# Altium PCB PCB_Radiance.PcbDoc (part 2 of 2)
Units mil, origin at the board's own origin, x right, y up, seen from the top; angles counter-clockwise.
Board outline 2362.21 x 2362.21 mil, 4 copper layers (Top Layer, GroundPlane, PowerPlane, Bottom Layer), stack 58.4 mil thick; 120 components, 82 nets, 399 pads, 18 vias.
Unrouted connection lines stored in the file: 128.
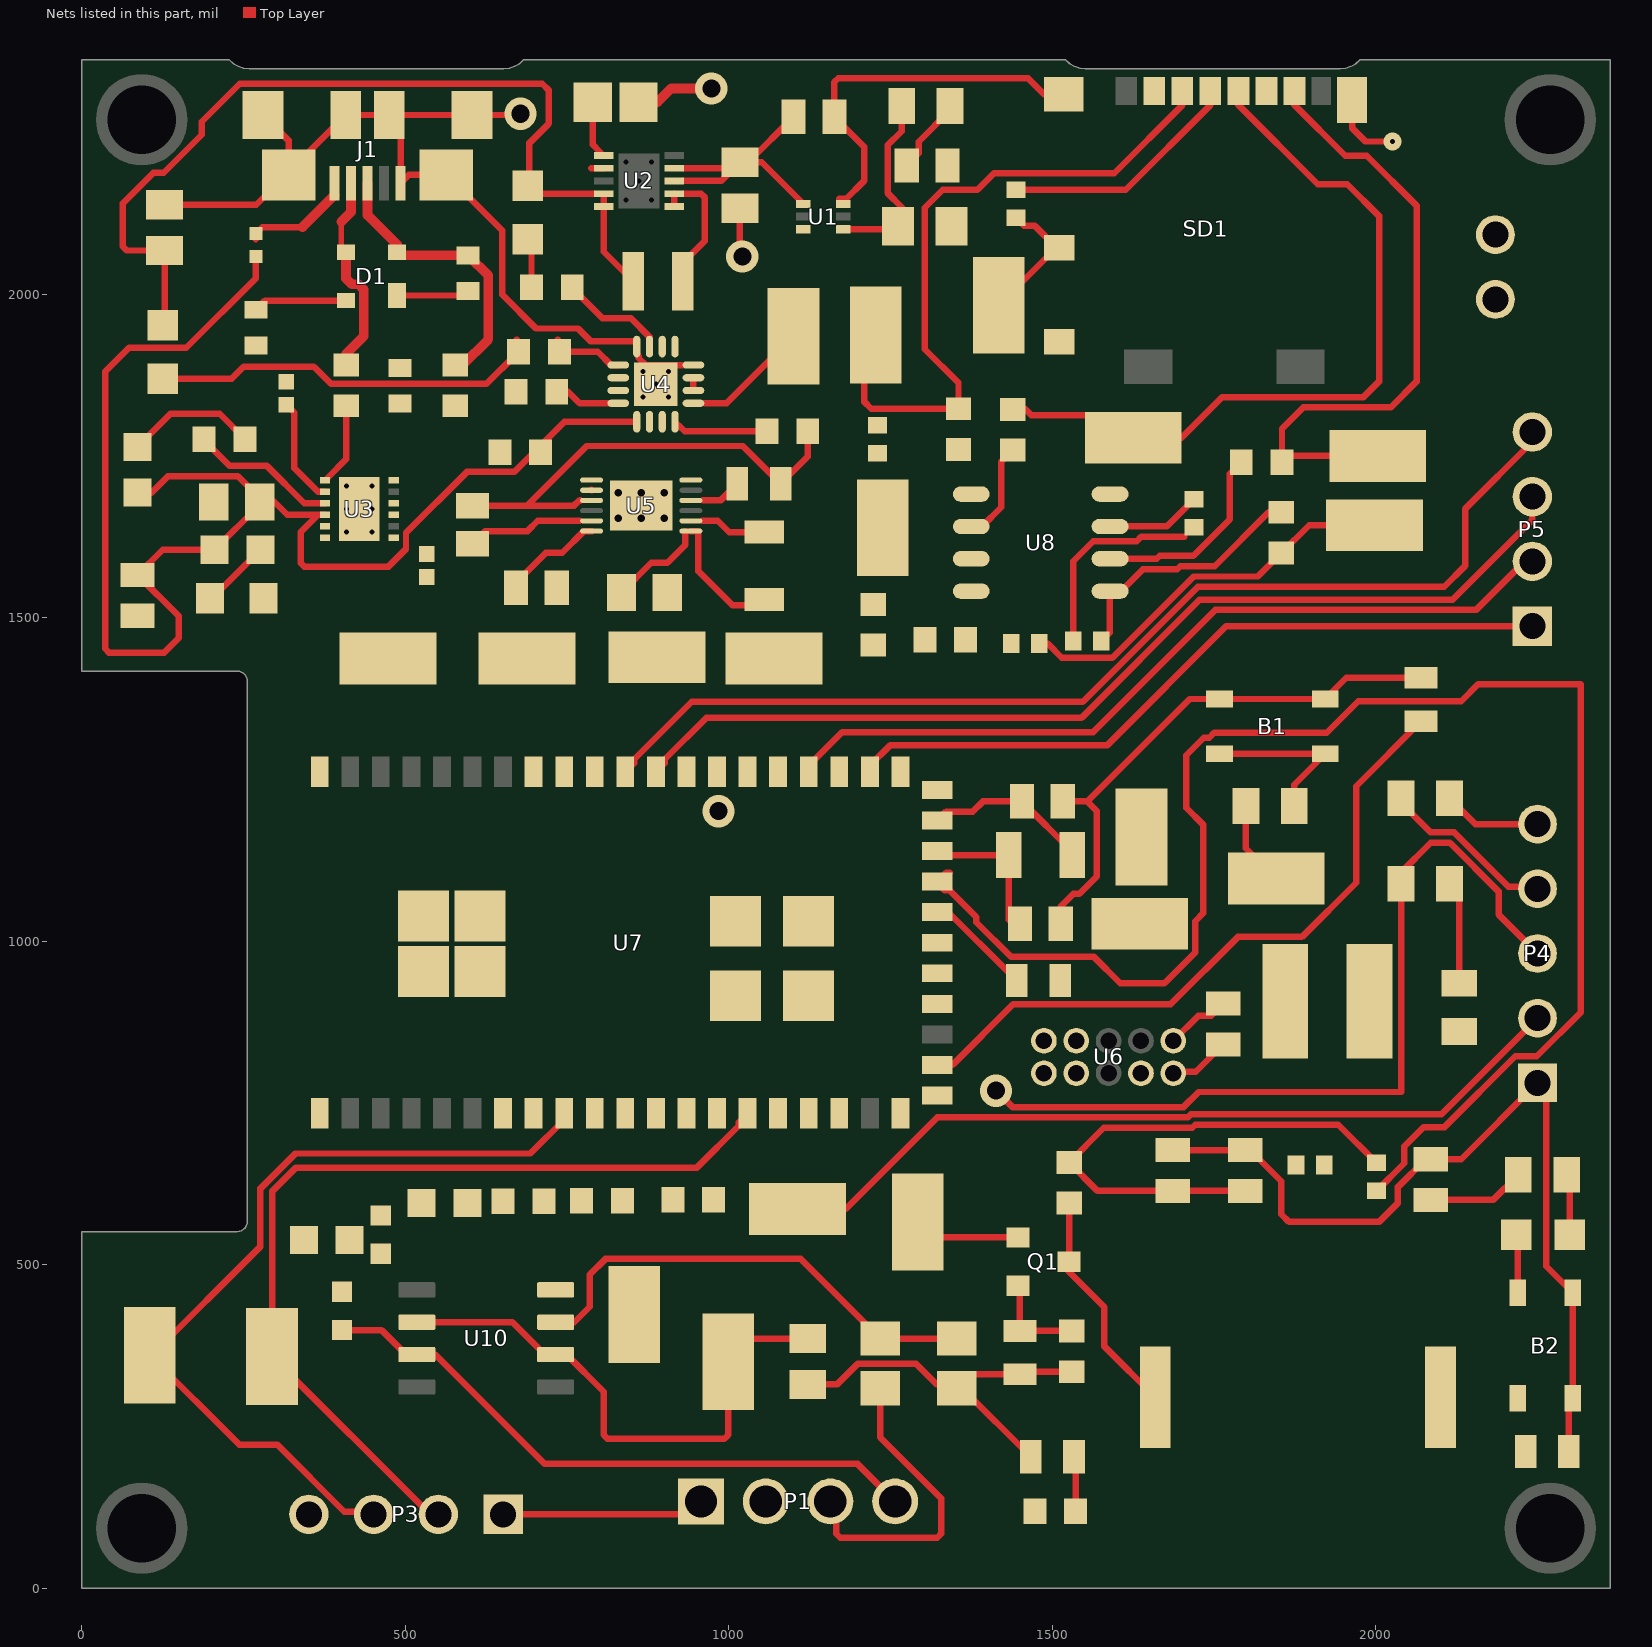
[diagram p2: the nets of this part, all layers, seen from the top]

## Part data (continued)
L1: library part CMP-0904-00016-1, "SDR0403 Series Power Inductor, 1 uF +/- 20 %, 0.033 Ohm, -40 to 125 degC, 2-Pin SMD, RoHS, Tape and Reel", Inductance (uH)=1, Manufacturer=Bourns, PartNumber=SDR0403-1R0ML, Temperature Range="-40 to 125 degC", Test Frequency (MHz)=7.96, Tolerance (%)="+/- 20", ComponentLink1Description="Manufacturer URL", ComponentLink1URL=http://www.bourns.com/, ComponentLink2Description=Datasheet, ComponentLink2URL=http://www.bourns.com/data/global/pdfs/sdr0403.pdf, DatasheetVersion=Feb-12, I rms (A)="3.8 Max.", I sat (A)="5.5 Typ.", Mounting Technology="Surface Mount", PackageDescription="3-Pin SMD, Dia 4.5 mm, Height 3.5 mm", PackageReference=SDR0403-2, Packing="Tape and Reel", Q=28, RDC (Ohm)="0.033 Max.", RoHS=TRUE, SRF (MHz)="150 Min."
L2: library part CMP-1411-00009-1, "Power Multilayer Inductor WE-MAPI, L=1.0µH", Inductance=1.0µH, Manufacturer="Wuerth Elektronik", PartNumber=74438323010, ComponentLink1Description="Manufacturer URL", ComponentLink1URL=http://www.we-online.com, ComponentLink2Description=Datasheet, ComponentLink2URL=http://katalog.we-online.de/kataloge/eisos/media/pdf/74438323010.pdf, PackageReference="SMD 2510"
P1: library part CMP-2000-05419-1, "Male Header, Pitch 2.54 mm, 1 x 4 Position, Height 10.03 mm, Tail Length 3.56 mm, RoHS, Bulk", Color=White, Current, Rating="5 /  / A", Flammability Rating=UL94V-0, Manufacturer="TE Connectivity", Temperature, Operating="-55to+105 /  / degC", Voltage, Rating="250 /  / V", Agency Approvals=CSA,UL, Angle=Straight, Brand/Series=MTA-100Series, Color, Housing=White, Connector Type=MTA-100, Contact Centerline Spacing="0.100 /  / in.", Contact Mating Area Plating=Tin, Contact Plating=Tin, Contact Shape=Square, Contact Termination Area Plating=Tin, Datasheet URL=https://datasheet.ciiva.com/16286/eng-ds-82056-mta-0608-16286228.pdf, Datasheet Version=Dec-14, Length, Overall="0.4 /  / \"", Length, Pin="0.14 /  / \"", Length, Terminal Post="0.14 /  / in.", Manufacturer URL=http://www.te.com/, Material, Contact=CopperAlloy, Material, Housing=Polyester, Mount Angle=Vertical, Mounting Hole Size="0.04 /  / \"", Mounting Type=PCMount, Number of Contacts=4, Number of Positions=4, Number of Rows=1, Pin Spacing="0.1 /  / \"", Primary Type=InterconnectSystem, Size, Post="0.025 /  / in.", Special Features=Pinstrip, Standards=RoHSCompliant,ELVCompliant,UL94V-0, Termination=Solder, Type=PCBPlug
P2: "CONN HEADER VERT 2POS .100 TIN", Colour=White,Natural,Beige, Contact Resistance=6mR, Current Rating=5A, Flammability Rating="UL94 V-0", Housing Colour=Natural, Manufacturer="TE Connectivity", Max Operating Temperature=221°C, Max Voltage Rating (AC)=250V, Min Operating Temperature=-67°C, Package Quantity=5000, Supplier Part Number 1=A1921-ND, Approvals=CSA, Backwall/Post Interruptions="No (Without)", ComponentLink1Description=https://datasheet.ciiva.com/709/eng-cd-640456-w1-709680.pdf, ComponentLink1URL=https://datasheet.ciiva.com/709/eng-cd-640456-w1-709680.pdf, ComponentLink2Description=https://datasheet.ciiva.com/3118/eng-ds-82056-mta-0608-3118497.pdf, ComponentLink2URL=https://datasheet.ciiva.com/3118/eng-ds-82056-mta-0608-3118497.pdf, ComponentLink3Description=https://datasheet.ciiva.com/19462/613931-19462481.pdf, ComponentLink3URL=https://datasheet.ciiva.com/19462/613931-19462481.pdf, ComponentLink4Description=https://datasheet.ciiva.com/14156/04384301-14156820.pdf, ComponentLink4URL=https://datasheet.ciiva.com/14156/04384301-14156820.pdf, ComponentLink5Description=https://datasheet.ciiva.com/7128/1866390-7128742.pdf, ComponentLink5URL=https://datasheet.ciiva.com/7128/1866390-7128742.pdf, ComponentLink6Description=https://datasheet.ciiva.com/16401/eng-ds-82056-mta-0608-16401289.pdf, ComponentLink6URL=https://datasheet.ciiva.com/16401/eng-ds-82056-mta-0608-16401289.pdf, ComponentLink7Description=https://datasheet.ciiva.com/16505/eng-ds-82056-mta-0608-16505419.pdf, ComponentLink7URL=https://datasheet.ciiva.com/16505/eng-ds-82056-mta-0608-16505419.pdf, ComponentLink8Description=https://datasheet.ciiva.com/25617/0900766b80027008-25617244.pdf, ComponentLink8URL=https://datasheet.ciiva.com/25617/0900766b80027008-25617244.pdf, ComponentLink9Description=https://datasheet.ciiva.com/11746/0900766b80eb7fdd-11746365.pdf, ComponentLink9URL=https://datasheet.ciiva.com/11746/0900766b80eb7fdd-11746365.pdf, Connector System=Wire-to-Board, Connector Type=Plug,Pin,Header, Contact Gender=Male, Contact Material="Copper Alloy", Contact Mating Length=0.295inch, Contact Plating=Tin, Contact Retention="No (Without)", Contact Shape=Square, Contact Style=Straight, Depth=5.72mm, ELV=Compliant, Fastening Type=Friction, Gender=Male, Height=7.87mm, Housing Material=Polyester, Lead Free="Lead Free", Lead Pitch=2.54mm, Length=5.08mm, Manufacturer Part Number=640456-2, Mating Alignment="No (Without)", Mating Post Length=7.49mm, Mating Retention="No (Without)", Max Current Rating=5A, Mount="Through Hole", Number of Contacts=2, Number of Poles=2, Number of Positions=2, Number of Rows=1, Orientation=Straight, Packaging=Bulk, Panel Mount Retention="No (Without)", PCB Mount Alignment="No (Without)", PCB Mounting Orientation=Vertical, PCB Mount Retention=Without, PCB Thickness=0.063inch, Pitch=2.54mm, Plating Thickness=3.81um, Pricing 1="1=0.12, 10=0.117, 100=0.0724, 500=0.0599, 1000=0.0524, 5000=0.0449, 10000=0.0437 (USD)", Radiation Hardening=No, REACH SVHC="No SVHC", Sealable="No (Without)", Stock 1=141304, Strain Relief="No (Without)", Supplier 1=Digi-Key, Tail Length=3.56mm, Termination=Solder, Termination Post Length=3.56mm, Underplate Material=Nickel, Voltage Rating=250V, Voltage Rating (AC)=250V, Working Voltage=250V
P3 P5: library part CMP-1024-00107-1, Manufacturer=Samtec, PartNumber=MTSW-104-07-L-S-170, Temperature Range="-55 to 125 degC", ComponentLink1Description="Manufacturer URL", ComponentLink1URL=http://www.samtec.com, ComponentLink2Description=Datasheet, ComponentLink2URL=http://www.samtec.com/documents/webfiles/pdf/MTSW.PDF, ComponentLink3Description="Package Specification", ComponentLink3URL=http://www.samtec.com/documents/webfiles/cpdf/MTSW-XXX-XX-X-X-XXXX-XX-XXX-MKT1.pdf, DatasheetVersion=F-214, Mounting Technology=Through-hole, Orientation=Vertical, PackageReference=MTSW-104-07-X-S-170, PackageVersion="BI, 2/1987", Pitch="2.54 mm", RoHS=True
P4: library part CMP-1024-00079-1, Manufacturer=Samtec, PartNumber=MTLW-105-05-L-S-190, Temperature Range="-55 to 125 degC", ComponentLink1Description="Manufacturer URL", ComponentLink1URL=http://www.samtec.com, ComponentLink2Description=Datasheet, ComponentLink2URL=http://www.samtec.com/documents/webfiles/pdf/MTLW_TH.PDF, ComponentLink3Description="Package Specification", ComponentLink3URL=http://www.samtec.com/documents/webfiles/cpdf/MTLW-1XX-XX-XX-X-XXX-XX-XX-MKT1.pdf, DatasheetVersion=F-214, Mounting Technology=Through-hole, Orientation=Vertical, PackageDescription="Low Profile Terminal Assembly", PackageReference=MTLW-105-05-X-S-190, PackageVersion="T, 6/1991", Pitch="2.54 mm", RoHS=True
Q1: library part CMP-1048-00774-1, "General Purpose Transistor, NPN Silicon, 3-Pin SOT-23, Pb-Free, Tape and Reel", Manufacturer="On Semiconductor", ComponentLink1Description="Manufacturer URL", ComponentLink1URL=http://www.onsemi.com/, ComponentLink2Description=Datasheet, ComponentLink2URL=http://www.onsemi.cn/pub_link/Collateral/BC846ALT1-D.PDF, ComponentLink3Description="Package Specification", ComponentLink3URL=http://www.onsemi.cn/pub_link/Collateral/318-08.PDF, DatasheetVersion="Rev. 11", fT Min (MHz)=100, IC Continuous (A)=0.1, Mounting Technology="Surface Mount", PackageDescription="3-Pin Small Outline Transistor, Body 2.92 x 1.3 mm, Pitch 0.95 mm", PackageReference=SOT-23-3-318-08, PackageVersion="Rev. AP, 11/2009", Packing="Tape and Reel", PartNumber=BC846ALT1G, Polarity=NPN, RoHS=TRUE
R1: library part CMP-1013-00810-1, "453K 0.125W 1% 0805 (2012 Metric)  SMD", Case-EIA=0805, Case-Metric=2012, Power="0.125 W", Tolerance="1 %", Technology=SMT
R2: library part CMP-1013-00124-1, "120K 0.125W 5% 0805 (2012 Metric)  SMD", Case-EIA=0805, Case-Metric=2012, Power="0.125 W", Tolerance="5 %", Technology=SMT
R3 R4 R34 R35 R36: library part CMP-1012-00331-1, "27R 0.1W 1% 0603 (1608 Metric)  SMD", Case-EIA=0603, Case-Metric=1608, Power="0.1 W", Tolerance="1 %", Technology=SMT
R5 R7 R27 R33: library part CMP-1012-00510-1, "1K 0.1W 1% 0603 (1608 Metric)  SMD", Case-EIA=0603, Case-Metric=1608, Power="0.1 W", Tolerance="1 %", Technology=SMT
R6 R16 R20 R21 R22 R28 R42: library part CMP-1012-00001-1, "Jumper 0603 (1608 Metric)", Case-EIA=0603, Case-Metric=1608, Power=None, Technology=SMT, Tolerance=None
R8 R9 R10 R11 R40: library part CMP-1012-00511-1, "1K02 0.1W 1% 0603 (1608 Metric)  SMD", Case-EIA=0603, Case-Metric=1608, Power="0.1 W", Tolerance="1 %", Technology=SMT
R12 R29 R30 R31 R32: library part CMP-1013-00624-1, "10K2 0.125W 1% 0805 (2012 Metric)  SMD", Case-EIA=0805, Case-Metric=2012, Power="0.125 W", Tolerance="1 %", Technology=SMT
R13: library part CMP-2003-00764-1, Manufacturer=Panasonic, Part Number=ERJ8BWFR010V
R14 R17 R18 R19 R23 R24 R43: library part CMP-1011-00098-1, "10K 0.063W 5% 0402 (1005 Metric)  SMD", Case-EIA=0402, Case-Metric=1005, Power="0.063 W", Tolerance="5 %", Technology=SMT
R15 R44: library part CMP-1013-00040-1, "39R 0.125W 5% 0805 (2012 Metric)  SMD", Case-EIA=0805, Case-Metric=2012, Power="0.125 W", Tolerance="5 %", Technology=SMT
R25 R26: library part CMP-2001-04376-1, Manufacturer=Panasonic, Part Number=ERJ-6ENF1002V
R37 R38 R39: library part CMP-1013-00594-1, "5K49 0.125W 1% 0805 (2012 Metric)  SMD", Case-EIA=0805, Case-Metric=2012, Power="0.125 W", Tolerance="1 %", Technology=SMT
R41: library part CMP-1013-00058-1, "220R 0.125W 5% 0805 (2012 Metric)  SMD", Case-EIA=0805, Case-Metric=2012, Power="0.125 W", Tolerance="5 %", Technology=SMT
Red1: library part CMP-1426-00010-1, "SMD mono-color Chip LED, WL-SMCW, Super Red", Color="Super Red", Manufacturer="Wuerth Elektronik", ComponentLink1Description="Manufacturer URL", ComponentLink1URL=http://www.we-online.com, ComponentLink2Description=Datasheet, ComponentLink2URL=http://katalog.we-online.com/led/datasheet/150080SS75000.pdf, PackageReference=0805_A, PartNumber=150080SS75000
SD1: library part CMP-2000-05825-1, "Micro SD Card, RA, -25 to 85 degC, 8-Pin SMD, RoHS, Tape and Reel", Current Rating=500mA, Manufacturer=Molex, Package Description="8-Pin Surface Mount Device, Body 11.95 x 11.4 mm, Pitch 1.1 mm", Voltage Rating=10VAC/DC, Brand=Molex, Card Type=microSD, Contact Material=PhosphorBronze, Contact Plating=Gold, Datasheet URL=http://www.molex.com/pdm_docs/sd/1040310811_sd.pdf, Datasheet Version="Rev. E, 04/2006", Height=1.42mm, Housing Material=LiquidCrystalPolymer(LCP), Insertion - Extraction Style=Push-Pull, Length=11.4mm, Manufacturer URL=http://www.molex.com/, Mating Cycles=10000, Mounting Technology=SurfaceMount, Mounting Type=Standard, Number of Contacts=8, Number of Rows=1Row, Orientation=RightAngle, Package Reference=104031-0811, Packaging=Reel, Pitch=1.1mm, Product=CardConnectors, Product Category=MemoryCardConnectors, RoHS=True, Series=104031, Termination Style=SMD
TP1 TP2 TP3 TP4 TP5 TP6 TP7 TP8 TP9 TP10 TP11 TP12 TP13 TP14 TP15 TP16 TP17 TP18 TP19 TP20: library part CMP-1672-00008-1, "Test Point, 1 Position SMD, RoHS, Tape and Reel", Package Quantity=1000, ComponentLink1Description="Manufacturer URL", ComponentLink1URL=http://www.keyelco.com/, ComponentLink2Description=Datasheet, ComponentLink2URL=http://www.keyelco.com/product-pdf.cfm?p=1357, Contact Plating=Silver, DatasheetVersion=03/2014, Mount="Surface Mount", Mounting Technology="Surface Mount", PackageDescription="1-Pin Surface Mount Device, Body 3.81 x 2.03 mm", PackageReference=5019, Packaging="Tape and Reel", Pins=1, RoHSCompliant=True
U1: Manufacturer="Texas Instruments", Manufacturer Part Number=TLV62569ADRLR, Supplier Part Number 1=296-51692-1-ND, Pricing 1="1 = 1.32000, 10 = 1.17600, 100 = 0.91680, 500 = 0.75736, 1000 = 0.59792 (USD)", Stock 1=1873, Supplier 1=Digi-Key
U2: Manufacturer="Texas Instruments", Max Input Voltage=5.5V, Max Operating Temperature=85°C, Max Output Current=2.1A, Min Input Voltage=2.3V, Min Operating Temperature=-40°C, Min Output Voltage=5V, Operating Supply Current=35uA, Package Quantity=250, Supplier Part Number 1=296-37990-1-ND, Switching Frequency=2MHz, ComponentLink1Description=http://www.farnell.com/datasheets/1902710.pdf?src-supplier=Element14, ComponentLink1URL=http://www.farnell.com/datasheets/1902710.pdf?src-supplier=Element14, Contact Plating=Gold, Efficiency=96%, Lead Free="Lead Free", Manufacturer Part Number=TPS61232DRCT, Min Supply Voltage=2.3V, Mount="Surface Mount", Nominal Output Voltage=5V, Number of Outputs=1, Number of Pins=10, Operating Supply Voltage=5.5V, Output Configuration=Positive, Output Current=2.1A, Output Type=Fixed, Output Voltage=5V, Packaging="Tape and Reel", Pricing 1="1 = 2.92000, 10 = 2.62600, 100 = 2.11050 (USD)", Quiescent Current=35uA, REACH SVHC="No SVHC", RoHS=Yes, Stock 1=5502, Supplier 1=Digi-Key, Synchronous Rectifier=Yes, Topology=Boost, Weight=0.000921oz
U3: library part CMP-0248-00027-1, "FT234XD USB to BASIC UART IC, -40 to +85 degC, 12-Pin DFN, Pb-Free, Tape and Reel", Manufacturer=FTDI, ComponentLink1Description="Manufacturer URL", ComponentLink1URL=http://www.ftdichip.com/, ComponentLink2Description=Datasheet, ComponentLink2URL=http://www.ftdichip.com/Support/Documents/DataSheets/ICs/DS_FT234XD.pdf, DatasheetVersion="ver 1.1, Feb-2013", PackageDescription="12-Pin Dual Flat No-Lead, 3 x 3 mm Body, 0.45 mm Pitch, Exposed Pad", PackageReference=DFN-12, PackageVersion=Feb-13, PartNumber=FT234XD-R
U4: library part CMP-0321-00237-1, "USB-Friendly Li-Ion Battery Charger and Power-Path Management IC, Vout 5.5 V, 4.3 V, -40 to 85 degC, 16-pin QFN (RGT), Green (RoHS & no Sb/Br)", Manufacturer="Texas Instruments", Over Voltage Protection=N, Code_JEDEC=MO-220, ComponentLink1Description=Datasheet, ComponentLink1URL=http://www.ti.com/general/docs/lit/getliterature.tsp?genericPartNumber=BQ24075&fileType=pdf, DatasheetVersion=SLUS810G, Eco-Plan="Green (RoHS & no Sb/Br)", Lead Acid=N, Li-Ion=N, Li-Polymer=N, Mounting Technology="Surface Mount", NiCd=N, NiMH=N, PackageDescription="16-Pin Plastic Quad Flat No-Lead, 3 x 3 mm Body, 0.5 mm Pitch, 1.7 x 1.7 mm Exposed Pad", PackageReference=RGT16-1700X1700TP, PackageVersion="revH, Oct-2011", PartNumber=BQ24075RGTRG4, SubFamily="Battery Charge Management", Vin(Min)(V)=4.3
U5: Capacity=8000mAh, Case/Package=QFN, Manufacturer="Texas Instruments", Max Operating Temperature=85°C, Min Operating Temperature=-40°C, Operating Supply Voltage=4.5V, Output Current=500uA, Output Voltage=600mV, Package Quantity=3000, Supplier Part Number 1=296-39941-1-ND, Contact Plating=Gold, Interface=I2C, Lead Free="Lead Free", Manufacturer Part Number=BQ27441DRZR-G1A, Mount="Surface Mount", Number of Cells=1, Number of Pins=12, Packaging="Tape and Reel", Pricing 1="1 = 2.62000, 10 = 2.35300, 100 = 1.89110, 500 = 1.55376, 1000 = 1.28740 (USD)", RoHS=Yes, Stock 1=20268, Supplier 1=Digi-Key
U6: "CONN HEADER 10POS UNSHD VERT T/H", Current Rating="10 A", Manufacturer="Amphenol / FCI", Supplier Part Number 1=609-3712-ND, Voltage Rating="125 V", Brand=FCI, ComponentLink1Description=https://datasheet.ciiva.com/1433/1079612-1433267.pdf, ComponentLink1URL=https://datasheet.ciiva.com/1433/1079612-1433267.pdf, ComponentLink2Description=https://datasheet.ciiva.com/409/20021111-409158.pdf, ComponentLink2URL=https://datasheet.ciiva.com/409/20021111-409158.pdf, ComponentLink3Description=https://datasheet.ciiva.com/5131/20021111-5131386.pdf, ComponentLink3URL=https://datasheet.ciiva.com/5131/20021111-5131386.pdf, ComponentLink4Description=https://datasheet.ciiva.com/9465/20021111-9465402.pdf, ComponentLink4URL=https://datasheet.ciiva.com/9465/20021111-9465402.pdf, Contact Material=Nickel, Contact Plating=Gold, Factory Pack Quantity=93, Housing Material=Plastic, Manufacturer Part Number=20021111-00010T4LF, Mating Post Length="3.05 mm", Mounting Angle=Vertical, Mounting Style="Through Hole", Number of Positions=10, Number of Positions / Contacts=10, Number of Rows=2, Packaging=Tube, Pitch="1.27 mm", Product Category="Headers & Wire Housings", Product Type=Headers, RoHS=Details, Series=Minitek, Stack Height="2.5 mm", Supplier 1=Digi-Key, Termination Post Length="2.3 mm", Termination Style="Through Hole", Type=Unshrouded
U7: "RF TXRX MODULE WIFI TRACE ANT", Current - Receiving=-, Frequency=2.4GHz, Manufacturer=Atmel, Manufacturer Part Number=ATSAMW25H18-MR510PB, Operating Temperature="-40°C ~ 85°C", Package / Case=Module, Power - Output=17dBm, Supplier Part Number 1=ATSAMW25H18-MR510PB-ND, Voltage - Supply="2.7 V ~ 4.2 V", Antenna Type="Integrated, Trace", Category="RF/IF and RFID", ComponentLink1Description=http://www.atmel.com/devices/ATSAMW25.aspx, ComponentLink1URL=http://www.atmel.com/devices/ATSAMW25.aspx, ComponentLink2Description=http://www.farnell.com/datasheets/1965115.pdf, ComponentLink2URL=http://www.farnell.com/datasheets/1965115.pdf, Current - Transmitting=-, Data Rate=65Mbps, Family="RF Transceiver Modules", Memory Size="256kB Flash, 32kB SRAM", Modulation=-, Mounting Type="Surface Mount", Packaging=Tray, Pricing 1="1=19.14 (USD)", Protocol=802.11b/g/n, RF Family/Standard=WiFi, Sensitivity=-95.5dBm, Serial Interfaces="SPI, UART", Series="Xplained Pro", Stock 1=120, Supplier 1=Digikey
U8: "IC FLASH 8MBIT 100MHZ 8SOIC", Manufacturer="Adesto Technologies", Operating Temperature="-40°C ~ 85°C (TC)", Package=8SOIC, Package / Case="8-SOIC (0.154\", 3.90mm Width)", Supplier Device Package=8-SOIC, Supplier Part Number 1=1265-1166-1-ND, Voltage - Supply="2.7 V ~ 3.6 V", Category="Integrated Circuits (ICs)", ComponentLink1Description=http://www.adestotech.com/wp-content/uploads/doc8715.pdf, ComponentLink1URL=http://www.adestotech.com/wp-content/uploads/doc8715.pdf, ComponentLink2Description=https://datasheet.ciiva.com/14084/doc8715-14084443.pdf, ComponentLink2URL=https://datasheet.ciiva.com/14084/doc8715-14084443.pdf, ComponentLink3Description=https://datasheet.ciiva.com/26910/getdatasheetpartid-730210-26910875.pdf, ComponentLink3URL=https://datasheet.ciiva.com/26910/getdatasheetpartid-730210-26910875.pdf, ComponentLink4Description=https://datasheet.ciiva.com/12251/doc8715-12251468.pdf, ComponentLink4URL=https://datasheet.ciiva.com/12251/doc8715-12251468.pdf, Format - Memory=FLASH, Interface="SPI, RapidS", Manufacturer Part Number=AT25DF081A-SSH-T, Memory Size="8M (4096 pages x 256 bytes)", Memory Type=FLASH, Packaging="Cut Tape (CT)", Part Status=Active, Pricing 1="1=1.18, 10=1.081, 25=1.0516, 50=1.0462, 100=0.9352, 250=0.9324, 500=0.9185, 1000=0.8791 (USD)", Rad Hard=No, RoHS="RoHS Compliant", Speed=100MHz, Stock 1=2550, Supplier 1=Digikey
U10: library part CMP-0272-00397-3, "MicroSIZE, Single-Supply CMOS Operational Amplifier MicroAmplifier(TM) Series, 2.5 to 5.5 V, -40 to 85 degC, 8-pin SOIC (D8), Green (RoHS & no Sb/Br)", Manufacturer="Texas Instruments", Rating=Catalog, Total Supply Voltage(Max)(+5V is 5, +/-5V is 10)=5.5, Total Supply Voltage(Min)(+5V is 5, +/-5V is 10)=2.5, CMRR(Min)(dB)=74, Code_JEDEC=MS-012, ComponentLink1Description="Manufacturer URL", ComponentLink1URL=http://www.ti.com/, ComponentLink2Description=Datasheet, ComponentLink2URL=http://www.ti.com/lit/ds/symlink/opa337.pdf, ComponentLink3Description="Package Specification", ComponentLink3URL=http://www.ti.com/litv/pdf/msoi002j, DatasheetVersion=SBOS077B, Eco-Plan="Green (RoHS & no Sb/Br)", GBW(Typ)(MHz)=3, IIB(Max)(pA)=10, Iq per channel(Max)(mA)=1, Mounting Technology="Surface Mount", Number of Channels=1, Offset Drift(Typ)(uV/C)=2, PackageDescription="8-Pin Plastic Small Outline, Body 4.9 x 3.9 mm, Pitch 1.27 mm", PackageReference=D0008A, PackageVersion="4040047-3/M, 06/2011", Packing="LARGE T&R", PartNumber=OPA337UA/2K5, Slew Rate(Typ)(V/us)=1.2, Sub Family="Low Input Bias Current Amp (<=10pA), Low Supply Voltage Amplifier (<=2.7V), Precision Amplifier", Vio (25C)(Max)(mV)=3
U11: library part CMP-2000-05277-1, "Piezoelectric Sound Component, 4 KHz, -20 to 70 degC, 2-Pin SMD, RoHS, Tape and Reel", Capacitance @ Frequency=-, Frequency=4kHz, Manufacturer=Murata, Operating Mode=Continuous, Operating Temperature=-20degC~70degC, Standard Package=1, Voltage - Rated=3Vp-p, Voltage Range=25V(Max), Category=AudioProducts, Current - Supply=-, Datasheet URL=https://datasheet.ciiva.com/34302/1874527-34302938.pdf, Datasheet Version=Jul-12, Driver Circuitry=Transducer,ExternallyDriven, Family=Buzzers, Featured Product=SMDPiezoelectricSounders, Input Type=peak-peakSignal, Manufacturer URL=http://www.murata.com/, Mounting Type=SurfaceMount, Online Catalog=PKSeries, Other Names=490-4683-6, Packaging=Digi-Reel, Port Location=Side, Series=PK, Size / Dimension=12.0mmLx12.0mmWx3.0mmH, Sound Pressure Level=-, Technology=Piezo, Termination=SolderPads, Washable=No
X1: library part CMP-0463-00001-2, "Crystal, 32.768 KHz, -40 to 85 degC, 3.2 x 1.5 x 0.9 mm SMD", Frequency Tolerance="+/-20 ppm", Load Capacitance="12.5 pF", Manufacturer=ITTI, Nominal Frequency=32.768KHz, Operating Temperature="-40 to 85 degC", ComponentLink1Description="Manufacturer URL", ComponentLink1URL=http://www.itti-co.com, Drive Level="1 max. uw", Mounting Technology="Surface Mount", PackageDescription="2-Pin Hand Drawn, Body 3.2 x 1.5mm, Pitch 2.5 mm", PackageReference=14340272-32.768KHz-2, PartNumber=14340272-32.768KHz

## Free pads (board coordinates)
  round 141.73 hole 106.3 paste-102.36: HH1(92.52,2269.69) HH2(2269.68,2269.69) HH3(92.52,92.52) HH4(2269.68,92.52)

## Via types
v1: diameter 50, hole 28, Top Layer to Bottom Layer, 6 vias
v2: diameter 19.68, hole 7.87, Top Layer to Bottom Layer, 6 vias
v3: diameter 19.68, hole 7.87, Top Layer to Bottom Layer, tented top, 5 vias
v4: diameter 28, hole 8, Top Layer to Bottom Layer, 1 vias

## Nets (pads, with @x,y where several pads share a name; then routed paths per layer and width w, separated by ;. In a path a pad name is that pad's centre, name@x,y a point inside that pad or via, vN(x,y) a via of type N, cw(c..) or ccw(c..) an arc to the next point about the centre after c; other vN are vias at no path point)
AT25_CS: R16.2 R17.2 U8.1 | length 397.9
  Top Layer w10: R17.2@1575.65,1464 1588.45,1476.8 1588.45,1540.17 U8.1@1589.28,1541 1606.02,1541 1640.02,1575 1693.17,1575 1697.84,1579.67 1750.99,1579.67 1834.32,1663 R16.2@1854,1663
AT25_HOLD: R19.2 U8.7
AT25_SCK: R20.2 U8.6 | length 154.4
  Top Layer w10: U8.6@1374.72,1641 1391.45,1641 1421.28,1670.83 1421.28,1741.29 R20.2@1439,1759.01
AT25_SI: R21.2 U8.5
AT25_SO: R22.2 U8.2 | length 305.7
  Top Layer w10: U8.2@1589.28,1591 1661.56,1591 1666.23,1595.67 1718.09,1595.67 1774.29,1651.87 1774.29,1722.28 R22.2@1792.01,1740
AT25_WP: R18.2 U8.3 | length 147.1
  Top Layer w10: U8.3@1589.28,1641 1677,1641 R18.2@1719,1683
BQ_BAT_TS: R28.2 TP1.1 U4.1 | length 197.6
  Top Layer w8.27: U4.1@945.32,1831.47 962.51,1831.47
  Top Layer w10: 962.51,1831.47 996.47,1831.47 TP1.1@1100,1935
BQ_EN_1: R30.2 U4.6 U7.14
BQ_EN_2: R31.1 U4.5 U7.22 | length 1055.7
  Top Layer w10: U7.22@1321.94,808.65 1345.56,808.65 1439.32,902.41 1682.73,902.41 1786.9,1006.58 1885.9,1006.58 1969.59,1090.27 1969.59,1239.66 R31.1@2070,1340.07
BQ_ILIM: R10.2 U4.12 | length 102.4
  Top Layer w10: R10.2@734,1849 751.72,1849 769.24,1831.47 U4.12@829.18,1831.47
BQ_Iset: R11.2 U4.16 | length 148.4
  Top Layer w8.27: U4.16@916.78,1802.93 922.75,1796.96
  Top Layer w10: 922.75,1796.96 931.71,1788 R11.2@1059.01,1788
BQ_SYSOFF: R32.1 U4.15 U7.27 | length 148.8
  Top Layer w10: U7.27@1321.94,1044.87 1339.2,1044.87 R32.1@1432.18,951.89
Buzzer: Q1.1 TP20.1 U7.34 | length 164.9
  Top Layer w10: TP20.1@1292,566 1316,542 Q1.1@1447,542
Control: P1.2 TP14.1 U7.18
Feedback: C26.2 TP13.1 U7.31 U10.2 U10.6 | length 848.2
  Top Layer w10: U10.6@517.72,411 665.55,411 715.55,361 U10.2@732.28,361 749.02,361 806.47,303.54 806.47,236.86 812.33,231 993.14,231 999,236.86 TP13.1@999,349.77 1035,385.77 C26.2@1122,385.77
FLASH_MEM_SPI_SS: R16.1 R23.2 SD1.2 TP12.1 U7.37 | length 611.8
  Top Layer w10: R23.2@1480,1460 1492.8,1460 1514.56,1438.24 1593.01,1438.24 1718.44,1563.67 1817.66,1563.67 R16.1@1854,1600.01 1896.99,1643 TP12.1@1998,1643
GND: B1.3 B1.4 B2.3 B2.4 C1.1 C3.1 C4.2 C5.1 C6.1 C7.1 C8.1 C9.1 C10.1 C11.1 C12.1 C13.1 C15.1 C16.1 C17.1 C18.1 C19.1 C20.2 C21.2 C23.1 C25.1 C26.1 D1.1 J1.5 J1.6 J1.7 J1.8 J1.9 J1.10 J1.11 P1.1 P2.1 P3.1 P4.1 R10.1 R11.1 R12.1 R26.1 R27.2 R29.1 R30.1 R31.2 R32.2 R41.1 R42.1 SD1.6 SD1.10 SD1.11 SD1.12 U1.6 U3.5 U3.13 U4.4 U4.8 U4.14 U4.17 U5.3 U5.13 U6.3 U6.7 U6.9 U7.0 U7.1 U7.10 U7.17 U7.20 U7.32 U7.42 U7.51 U8.4 U10.4 | length 6444
  Top Layer w5.91: U5.3@770.08,1681.19 U5.3@787.8,1681.19
  Top Layer w8.27: 928.14,1890.53 U4.4@945.32,1890.53
  Top Layer w10: C13.1@128,2138.43 269.5,2138.43 J1.11@319.49,2188.42 ; J1.10@280.12,2277 319.49,2237.63 J1.11@319.49,2188.42 ; J1.11@319.49,2184.48 J1.11@319.49,2188.42 ; D1.1@487,1998 590.12,1998 C10.1@597,2004.88 ; C15.1@604,1673.31 688.32,1673.31 ; P3.1@651,114 937,114 P1.1@957,134 ; v1(678,2279) 676,2277 J1.7@602.95,2277 J1.8@475,2277 ; U5.3@770.08,1681.19 769.27,1680.38 767.83,1680.38 760.77,1673.31 688.32,1673.31 ; 928.14,1890.53 906.94,1890.53 871.38,1890.53 860.9,1901.01 860.9,1904.4 857.72,1907.57 U4.8@857.72,1919.07 857.72,1926.53 857.25,1927 786.87,1927 766.87,1947 702,1947 650,1999 650,2098.06 J1.6@563.58,2184.48 505.51,2184.48 J1.5@492.72,2171.69 492.72,2259.28 J1.8@475,2277 ; C1.1@1017,2133 1017,2062.28 v1(1021,2058.28) ; C26.1@1122,314.91 1167.26,314.91 1198.93,346.57 1289.82,346.57 1321.49,314.91 1346.09,314.91 R26.1@1352,309 ; R11.1@1122,1788 1122,1749 R12.1@1080,1707 1021.62,1765.38 780.38,1765.38 688.32,1673.31 ; 1170.34,2147.34 1178.63,2147.34 1179.98,2145.98 1209,2175 1209,2228.09 C3.1@1163.09,2274 1163.09,2327.91 1168.95,2333.76 1462.5,2333.76 1487.1,2309.17 SD1.11@1517.61,2309.17 ; R29.1@1466.54,203 1360.54,309 R26.1@1352,309 ; C20.2@1512,1035 1513,1036 1513,1053.57 1532.72,1073.29 1541.97,1073.29 1569,1100.33 1569,1201 1554,1216 ; C21.2@1516,1216 1554,1216 ; R42.1@1530,334.5 1453.97,334.5 R41.1@1450,330.54 1373.54,330.54 R26.1@1352,309 ; C17.1@1686,677 C18.1@1798,676.99 1805.87,676.99 1854,628.87 1854,578 1866,566 2005,566 2034.21,595.21 2034.21,620.08 2077.13,662.99 C23.1@2085,662.99 2131.99,662.99 P4.1@2250,781 2263.33,767.67 2263.33,497.69 B2.4@2304.32,456.69 B2.3@2304.32,293.31 2298.46,287.45 R30.1@2298.46,211 ; U6.9@1687,796 1689.3,798.3 1721.8,798.3 C19.1@1764,840.5 ; SD1.12@1963.28,2300.31 1963.28,2256.72 1984,2236 v4(2026,2236) ; R31.2@2070,1407 1954.37,1407 B1.3@1921.69,1374.32 B1.4@1758.31,1374.32 1712.32,1374.32 1554,1216 ; J1.11@319.49,2188.42 J1.9@408.07,2277 J1.8@475,2277
  Top Layer w15: C4.2@860.43,2297 889.96,2297 910.96,2318 v1(973,2318)
  Top Layer w30: SD1.12@1963.28,2300.31 SD1.12@1967.06,2304.09
  other v2: 409.17,1632.43 448.54,1632.43 409.17,1667.86 448.54,1667.86 409.17,1703.29 448.54,1703.29
  other v3: 867.57,1841.31 906.94,1841.31 887.25,1861 867.57,1880.69 906.94,1880.69
Guage_Int: R37.2 TP2.1 U5.12 U7.36
INT_2: P4.2 TP19.1 U7.13 | length 1266.2
  Top Layer w10: TP19.1@1106,586 1180.8,586 1322.35,727.54 1709.45,727.54 1714.13,732.23 2101.23,732.23 P4.2@2250,881
MCU_LED: DS2.2 U7.16
MCU_RESET: C19.2 R14.2 R15.1 TP6.1 U6.10 U7.24 | length 232.2
  Top Layer w10: U6.10@1687,846 1725.8,884.8 1745.3,884.8 C19.2@1764,903.5 ; R15.1@1799.2,1209 1799.2,1143.8 TP6.1@1846,1097
MEM_SPI_CLK: R20.1 R36.2 SD1.5 TP11.1 | length 1186.2
  Top Layer w10: R20.1@1439,1822 1458.68,1822 1467.72,1812.96 1590.04,1812.96 TP11.1@1625,1778 1699.8,1778 1762.8,1841 1981,1841 2005,1865 2005,2121 1956,2170 1910.13,2170 1787.69,2292.44 SD1.5@1787.69,2314.09
MEM_SPI_MISO: R22.1 R35.2 SD1.7 TP10.1 | length 989.1
  Top Layer w10: SD1.7@1874.3,2314.09 1874.3,2292.44 1952.74,2214 1986,2214 2063,2137 2063,1865 2023,1825 1888,1825 1855,1792 R22.1@1855,1740 1865,1750 TP10.1@2003,1750
MEM_SPI_MOSI: R21.1 R34.2 SD1.3 TP9.1 | length 1078.7
  Top Layer w10: TP9.1@1227,1937 1209,1919 1209,1834 1220,1823 R21.1@1355,1823 1355,1863 1303,1915 1303,2133.69 1330.73,2161.43 1384.28,2161.43 1409.86,2187 1595.64,2187 1701.07,2292.44 SD1.3@1701.07,2314.09
NetB1_1: B1.1 B1.2 R15.2 | length 263.8
  Top Layer w10: B1.2@1758.31,1289.68 B1.1@1921.69,1289.68 1874,1241.98 R15.2@1874,1209
NetB2_1: B2.1 B2.2 D4.C | length 90.3
  Top Layer w10: D4.C@2217.32,546 2219.68,543.65 B2.2@2219.68,456.69
NetC2_1: C2.1 R2.1 | length 119.7
  Top Layer w10: C2.1@1275.01,2199 1293.71,2217.7 1293.71,2235.82 1342,2284.11 R2.1@1342,2291
NetC4_1: C4.1 U2.6 | length 89.6
  Top Layer w7.68: 801.35,2219.49 U2.6@806.47,2214.37
  Top Layer w10: C4.1@789.57,2297 789.57,2231.28 801.35,2219.49
NetC11_2: C11.2 R6.2 R7.2 U3.2 | length 369.1
  Top Layer w10: R7.2@86,1764 137,1815 213,1815 R6.2@251.99,1776 ; C11.2@316,1829.28 328.2,1817.08 328.2,1731.29 364.99,1694.51 375.62,1694.51 U3.2@375.7,1694.43
NetC14_1: C14.1 U4.2 U4.3 | length 19.7
  Top Layer w10: U4.2@945.32,1851.16 U4.3@945.32,1870.84
NetC15_2: C15.2 U5.5 | length 198.5
  Top Layer w5.91: 769.75,1649.69 U5.5@787.8,1649.69
  Top Layer w10: C15.2@604,1614.26 623.68,1633.94 688.85,1633.94 704.59,1649.69 769.75,1649.69
NetC16_2: C16.2 U5.6 | length 157.8
  Top Layer w10: C16.2@671.01,1546 671.01,1553.87 717.36,1600.23 742.42,1600.23 776.14,1633.94 U5.6@787.8,1633.94
NetC22_2: C22.2 U8.8
NetD2_C: D2.C R8.2 | length 607.4
  Top Layer w10: D2.C@125,1869.32 231.39,1869.32 249.99,1887.92 358.65,1887.92 385.35,1861.22 625.23,1861.22 672.5,1908.5 R8.2@672.5,1930
NetD3_2: D3.2 R9.2 | length 61
  Top Layer w10: D3.2@689,2084.98 D3.2@689,2089.98 ; R9.2@695,2011 D3.2@695,2067
NetD4_A: D4.A R44.2 | length 95.1
  Top Layer w10: R44.2@2295,639 2300,634 D4.A@2300,546
NetDS1_2: DS1.2 R27.1
NetDS2_1: DS2.1 R33.2
NetL1_1: L1.1 U1.3
NetL2_1: L2.1 U2.1 U2.2 | length 213.1
  Top Layer w7.68: U2.2@915.53,2155.31 U2.2@930.49,2155.31
  Top Layer w10: U2.1@915.53,2135.63 U2.2@915.53,2155.31 ; L2.1@929,2020 929,2048.54 963,2082.54 963,2149.46 957.14,2155.31 U2.2@930.49,2155.31
NetP1_3: P1.3 R25.2 | length 511.6
  Top Layer w10: P1.3@1157,134 1166.14,124.86 1166.14,83.86 1172,78 1322.14,78 1328,83.86 1328,139 1234,233 R25.2@1234,309 R25.2@1253,290
NetP5_1: P5.1 U7.33 | length 1123.2
  Top Layer w10: U7.33@1217.96,1261.56 1217.96,1271.4 1249.15,1302.59 1584.59,1302.59 1769,1487 P5.1@2242,1487
NetP5_2: P5.2 U7.35 | length 1259.1
  Top Layer w10: U7.35@1123.47,1261.56 1123.47,1271.4 1175.07,1323 1563,1323 1752.04,1512.04 2155.04,1512.04 2230,1587 P5.2@2242,1587
NetP5_3: P5.3 U7.40 | length 1555.4
  Top Layer w10: U7.40@887.25,1261.56 901.03,1275.34 901.03,1281.05 964.98,1345 1545.02,1345 1728.06,1528.04 2119.04,1528.04 2242,1651 P5.3@2242,1687
NetP5_4: P5.4 U7.41 | length 1683.3
  Top Layer w10: U7.41@840.01,1261.56 853.79,1275.34 853.79,1281.05 942.73,1370 1547.4,1370 1725.07,1547.67 2105.67,1547.67 2138,1580 2138,1668 2242,1772 P5.4@2242,1787
NetQ1_2: Q1.2 R41.2 R42.2 | length 151
  Top Layer w10: Q1.2@1447,467.2 1450,464.2 R41.2@1450,397.46 ; R41.2@1450,397.46 R42.2@1530,397.5
NetQ1_3: Q1.3 R40.1 U11.2 | length 355.3
  Top Layer w10: R40.1@1526,595.01 1526,504.86 Q1.3@1525.74,504.6 1525.74,488.85 1580.59,434 1580.59,373.47 U11.2@1659.06,295
NetR1_1: R1.1 R2.2 U1.4 | length 292.9
  Top Layer w9.45: U1.4@1176.91,2100.31 1187.93,2100.31
  Top Layer w10: 1187.93,2100.31 1256.64,2100.31 R1.1@1261.32,2105 1267.2,2110.87 1267.2,2134.53 1245.31,2156.42 1245.31,2230.13 1267.2,2252.02 R2.2@1267.2,2291
NetR3_2: R3.2 U3.1 | length 129.2
  Top Layer w7.38: U3.1@375.7,1712.15 U3.1@380.62,1717.07
  Top Layer w10: U3.1@380.62,1717.07 409,1745.45 R3.2@409,1827.54
NetR4_2: R4.2 U3.12
NetR5_1: R5.1 Red1.2 | length 108.7
  Top Layer w10: Red1.2@198.32,1530 201,1530 R5.1@276,1605
NetR8_1: R8.1 U4.9 | length 119.7
  Top Layer w10: R8.1@735.5,1930 735.5,1913.5 R8.1@738,1911 797.49,1911 817.96,1890.53 U4.9@829.18,1890.53
NetR9_1: R9.1 U4.7 | length 180.1
  Top Layer w8.27: U4.7@877.41,1919.07 U4.7@877.41,1932.63
  Top Layer w10: R9.1@747.24,2021.75 R9.1@757.99,2011 ; R9.1@758.5,2009 804.38,1963.12 848.25,1963.12 877.41,1933.96 U4.7@877.41,1932.63
NetR12_2: R12.2 U5.10 | length 82.4
  Top Layer w5.91: U5.10@941.34,1681.19 959.38,1681.19
  Top Layer w10: 959.38,1681.19 987.26,1681.19 R12.2@1013.07,1707
NetR13_1: R13.1 U5.8 | length 120.9
  Top Layer w5.91: U5.8@941.34,1649.69 U5.8@959.06,1649.69
  Top Layer w10: U5.8@959.06,1649.69 983.01,1649.69 1000.54,1632.17 R13.1@1055,1632.17
NetR25_1: R25.1 R26.2 U10.3 | length 740.2
  Top Layer w10: U10.3@732.28,411 760.99,411 785.13,435.14 785.13,484.66 809.27,508.8 1110.97,508.8 R25.1@1234,385.77 R26.2@1352,385.77
NetR28_1: R28.1 R29.2 | length 85.1
  Top Layer w10: R29.2@1533.46,203 1536,200.46 R28.1@1536,119
NetRed1_1: Red1.1 U3.6
SCL_2: P4.4 R38.2 TP17.1 U5.2 U7.39 | length 274.2
  Top Layer w10: U5.2@786.98,1697.75 U5.2@787.8,1696.94 ; R38.2@2039,1221 2039,1214.11 2085.11,1168 2121.22,1168 2205.08,1084.14 2246.86,1084.14 P4.4@2250,1081
SCL_IR: P3.3 TP15.1 U7.9 | length 1301.7
  Top Layer w10: P3.3@451,114 446.78,118.22 405.49,118.22 301.81,221.9 243.1,221.9 TP15.1@105,360 108,360 276.01,528.01 276.01,617.74 330.06,671.79 693.16,671.79 745.52,724.16 U7.9@745.52,734
SD_CARD_DETECT: R24.2 SD1.9 TP8.1 | length 208.6
  Top Layer w10: TP8.1@1417,1983 1505.96,2071.96 1506.78,2071.96 1473.2,2105.55 1456.8,2105.55 R24.2@1444,2118.35
SDA_2: P4.3 R39.2 TP18.1 U5.1 U7.38 | length 1307.1
  Top Layer w10: v1(1413,769) 1438.46,743.54 1702.82,743.54 1726.13,766.86 2039,766.86 R39.2@2039,1089 2039,1106 2085,1152 2114.59,1152 2189.75,1076.84 2189.75,1041.25 P4.3@2250,981
  other v1: 984,1201
SDA_IR: P3.2 TP16.1 U7.15 | length 1401.6
  Top Layer w10: P3.2@551,114 538,114 TP16.1@294,358 294,613.1 331,650.1 950.8,650.1 1015.2,714.51 1015.2,720.22 U7.15@1028.98,734
SERCOM1_PAD2_SPI_MISO: R35.1 U7.8
SERCOM1_PAD2_SPI_MOSI: R34.1 U7.11
SERCOM1_PAD3_SPI_SCK: R36.1 U7.12
SERCOM4_UART_RX_CLI: U3.7 U7.43
SERCOM4_UART_TX_CLI: U3.10 U7.44
SWCLK: TP4.1 U6.2 U7.25
SWDIO: TP5.1 U6.4 U7.26 | length 105.9
  Top Layer w10: TP5.1@1609,1193 1609,1190 TP5.1@1638,1161 1638,1213 TP5.1@1645,1220
TEST_BUTTON: C23.2 R43.2 R44.1 U7.28 | length 2594.4
  Top Layer w10: U7.28@1341.43,1105.89 1335.72,1105.89 U7.28@1321.94,1092.11 1321.94,1090.06 1333.67,1078.33 1341.43,1078.33 1382.56,1037.2 1382.56,1029.44 1436.41,975.59 1564.41,975.59 1605,935 1673.32,935 1720.8,982.48 1720.8,1030.8 1733,1043 1733,1180.32 1707,1206.32 1707,1287.39 1734.12,1314.51 1742.51,1314.51 1750,1322 1924,1322 1973,1371 2132,1371 2158,1397 2317,1397 2317,890.13 2248.79,821.92 2215.52,821.92 2106.33,712.73 2073.91,712.73 2043.85,682.68 2043.85,656.85 R43.2@2001,614 ; C23.2@2085,600 2181.2,600 R44.1@2220.2,639
USB_DATA_N: C9.2 D1.3 J1.2 R3.1 | length 318.8
  Top Layer w8: 401,2112 401,2072.19 D1.3@408.26,2064.93
  Top Layer w11.81: J1.2@415.94,2145.11 J1.2@415.94,2171.69
  Top Layer w15: 401,2112 415.94,2126.94 J1.2@415.94,2145.11 ; D1.3@408.26,2064.93 408.26,2024.22 417.05,2015.44 427.63,2015.44 435.54,2007.53 435.54,1934.78 409,1908.24 R3.1@409,1890.53
USB_DATA_P: C10.2 D1.2 J1.3 R4.1 | length 448
  Top Layer w15: J1.3@441.54,2171.69 441.54,2122.2 487,2076.74 D1.2@487,2064.93 491.93,2060 C10.2@597,2060 628.22,2028.78 628.22,1930.22 588.53,1890.53 R4.1@577,1890.53
V_5V: C1.2 C3.2 DS1.1 P1.4 U1.1 U2.3 U2.4 U2.7 U10.7 | length 1413.7
  Top Layer w7.68: U2.3@915.53,2175 U2.3@930.49,2175 ; U2.4@915.53,2194.69 U2.4@930.49,2194.69
  Top Layer w9.45: U1.1@1108.8,2145.98 U1.1@1115.09,2139.69
  Top Layer w10: DS1.1@402,398.94 463.04,398.94 500.98,361 U10.7@517.72,361 546.43,361 715.43,192 1199,192 P1.4@1257,134 ; 787.2,2194.8 806.35,2194.8 U2.7@806.47,2194.69 ; U2.3@930.49,2175 988.13,2175 C1.2@1007.82,2194.69 ; U2.4@930.49,2194.69 C1.2@1007.82,2194.69 ; C3.2@1100.1,2274 C1.2@1029.97,2203.87 ; U1.1@1108.8,2145.98 1050.91,2203.87 C1.2@1029.97,2203.87 ; C1.2@1007.82,2194.69 C1.2@1017,2203.87 C1.2@1029.97,2203.87
Vbat: C14.2 P2.2 R13.2 TP3.1 U5.7 | length 363.1
  Top Layer w5.91: U5.7@929.68,1633.94 931.86,1633.94 U5.7@941.34,1633.94
  Top Layer w10: C14.2@834.13,1539 880.24,1585.11 905.15,1585.11 932.92,1612.88 932.92,1632.88 U5.7@931.86,1633.94 ; U5.7@941.34,1633.94 951.86,1633.94 952.92,1632.88 952.92,1572.08 1006,1519 1046.17,1519 R13.2@1055,1527.83
VBUS: C6.2 D1.4 FB1.1 J1.1 | length 318.4
  Top Layer w10: C6.2@269,1976 283.13,1990.13 D1.4@408.26,1990.13 ; FB1.1@269,2084.98 FB1.1@269,2093.72 278.84,2103.56 340.93,2103.56 ; J1.1@390.35,2152.98 J1.1@390.35,2171.69
  Top Layer w15: 340.93,2103.56 J1.1@390.35,2152.98
VCC_MCU: C2.2 C17.2 C18.2 C22.1 C25.2 L1.2 P3.4 P4.5 R1.2 R14.1 R17.1 R18.1 R19.1 R23.1 R24.1 R33.1 R37.1 R38.1 R39.1 R40.2 R43.1 SD1.4 TP7.1 U6.1 U7.7 U7.21 U11.1 | length 1814
  Top Layer w10: R24.1@1444,2161.65 1613.6,2161.65 1744.38,2292.44 SD1.4@1744.38,2314.09 ; R17.1@1532.35,1464 1532.35,1587.43 1563.1,1618.19 1630.3,1618.19 1637.11,1625 1704.31,1625 ; C18.2@1798,614 C17.2@1686,614.01 1569.99,614.01 R40.2@1526,658 1579.54,711.54 1716.07,711.54 1720.76,716.23 1942.08,716.23 R43.1@2001,657.31 ; R39.1@2113.8,1089 2129,1073.8 R37.1@2129,935 ; R38.1@2113.8,1221 2153.8,1181 P4.5@2250,1181
VCCIO: C5.2 R6.1 U3.3 U3.9 | length 229
  Top Layer w10: R6.1@189,1776 189,1774.03 228.49,1734.54 286.06,1734.54 343.89,1676.72 U3.3@375.7,1676.72
Vin: C13.2 D2.A D3.1 L2.2 U2.9 U2.10 U4.10 U4.11 | length 1435.9
  Top Layer w7.68: U2.9@791.51,2155.31 U2.9@806.47,2155.31 U2.9@806.47,2150.2
  Top Layer w10: D2.A@125,1952 128,1955 C13.2@128,2067.57 69.43,2067.57 63.14,2073.86 63.14,2140.31 110.65,2187.82 126.43,2187.82 185.25,2246.64 185.25,2266.58 244.07,2325.4 711.6,2325.4 722,2315 722,2264 691.76,2233.76 691.76,2168.24 692.02,2168.24 704.94,2155.31 U2.9@791.51,2155.31 ; U2.9@806.47,2150.2 U2.10@806.47,2135.63 806.47,2065.76 L2.2@852.23,2020
VUSB: C7.2 C8.2 C12.2 FB1.2 R5.2 R7.1 U3.4 U4.13 | length 2296.5
  Top Layer w8.27: 851.76,1802.93 U4.13@857.72,1802.93
  Top Layer w10: R7.1@86,1693.13 107.65,1693.13 133.06,1718.54 241.23,1718.54 274.87,1684.91 C8.2@274.87,1679 ; FB1.2@269,2058.28 269,2024.86 161.52,1917.38 72.86,1917.38 36,1880.52 36,1451.86 41.86,1446 127,1446 150,1469 150,1502 C12.2@86,1566 125,1605 R5.2@205.13,1605 274.87,1674.73 C8.2@274.87,1679 ; 851.76,1802.93 745.89,1802.93 668.28,1725.31 595.17,1725.31 501,1631.15 501,1606 474,1579 343.86,1579 338,1584.86 338,1631.93 364.99,1658.92 375.62,1658.92 U3.4@375.7,1659 317.5,1659 297.5,1679 C8.2@274.87,1679
XIN_32: C20.1 U7.29 X1.1 | length 213.3
  Top Layer w10: U7.29@1321.94,1139.35 1328.29,1133 X1.1@1432.57,1133 C20.1@1432.57,1033
XOUT_32: C21.1 U7.30 X1.2 | length 258.6
  Top Layer w10: U7.30@1321.94,1186.6 1335.72,1200.38 1377.2,1200.38 1392.82,1216 C21.1@1453.01,1216 1531,1138.01 X1.2@1531,1133
pads on no net: J1.4 SD1.1 SD1.8 SD1.13 SD1.14 U1.2 U1.5 U2.5 U2.8 U2.11 U2.P$1 U2.P$2 U2.P$3 U2.P$4 U2.P$5 U3.8 U3.11 U5.4 U5.9 U5.11 U5.14 U5.15 U5.16 U5.17 U5.18 U5.19 U6.5 U6.6 U6.8 U7.2 U7.3 U7.4 U7.5 U7.6 U7.19 U7.23 U7.45 U7.46 U7.47 U7.48 U7.49 U7.50 U10.1 U10.5 U10.8
copper on no net:
  other v1: 749,2204

## Other copper
Top Layer:
  region: 990.16,1868.07

## Silkscreen, mask and mechanical layers (free items; w line width, h text height)
Mechanical 1:
  the board outline again, w10

## Text inside footprints (layer, text, board x,y; h text height)
J1: Mechanical 1 "Board edge" at 221.54,2329.34 h7.87 r180